# Altium PCB SmartSequins9.1.2.PcbDoc
Units mm, origin at the board's own origin, x right, y up, seen from the top; angles counter-clockwise.
Board outline 25 x 25 mm, 2 copper layers (Top Layer, Bottom Layer), stack 0.481 mm thick; 46 components, 21 nets, 103 pads, 33 vias.
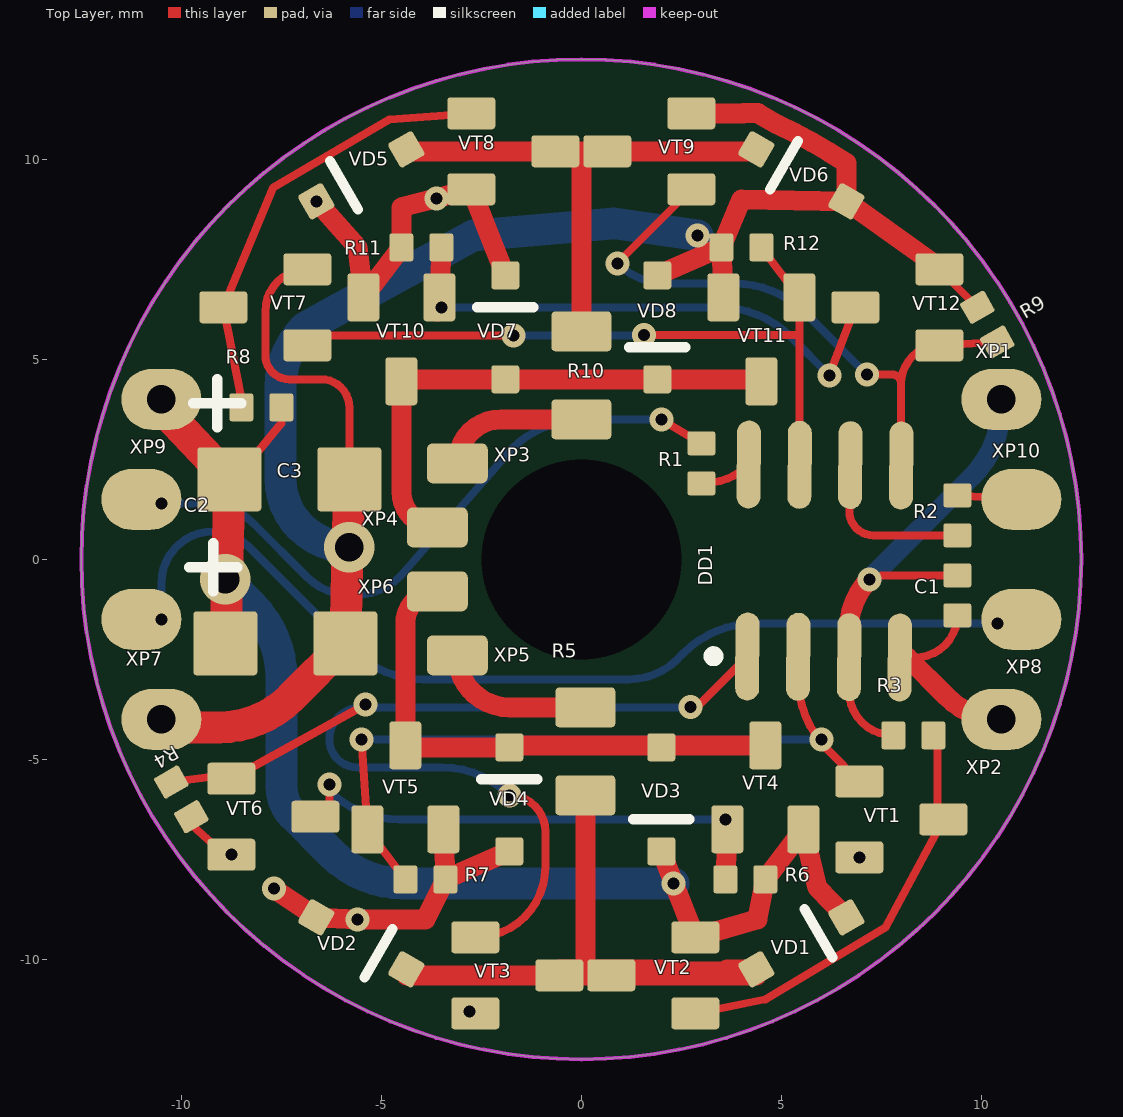
[diagram p0: Top Layer view]
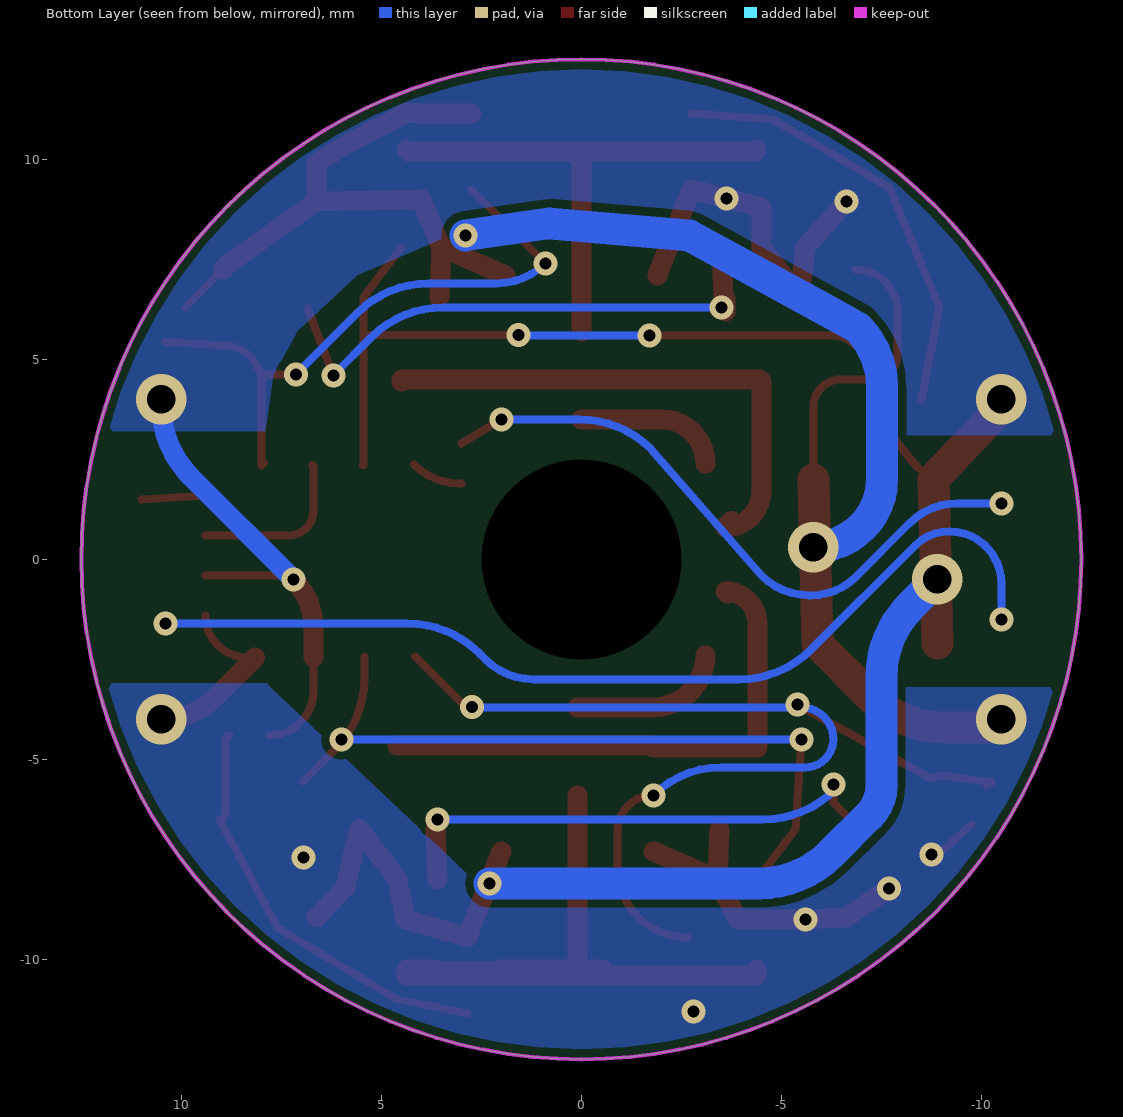
[diagram p1: Bottom Layer view, seen from below]
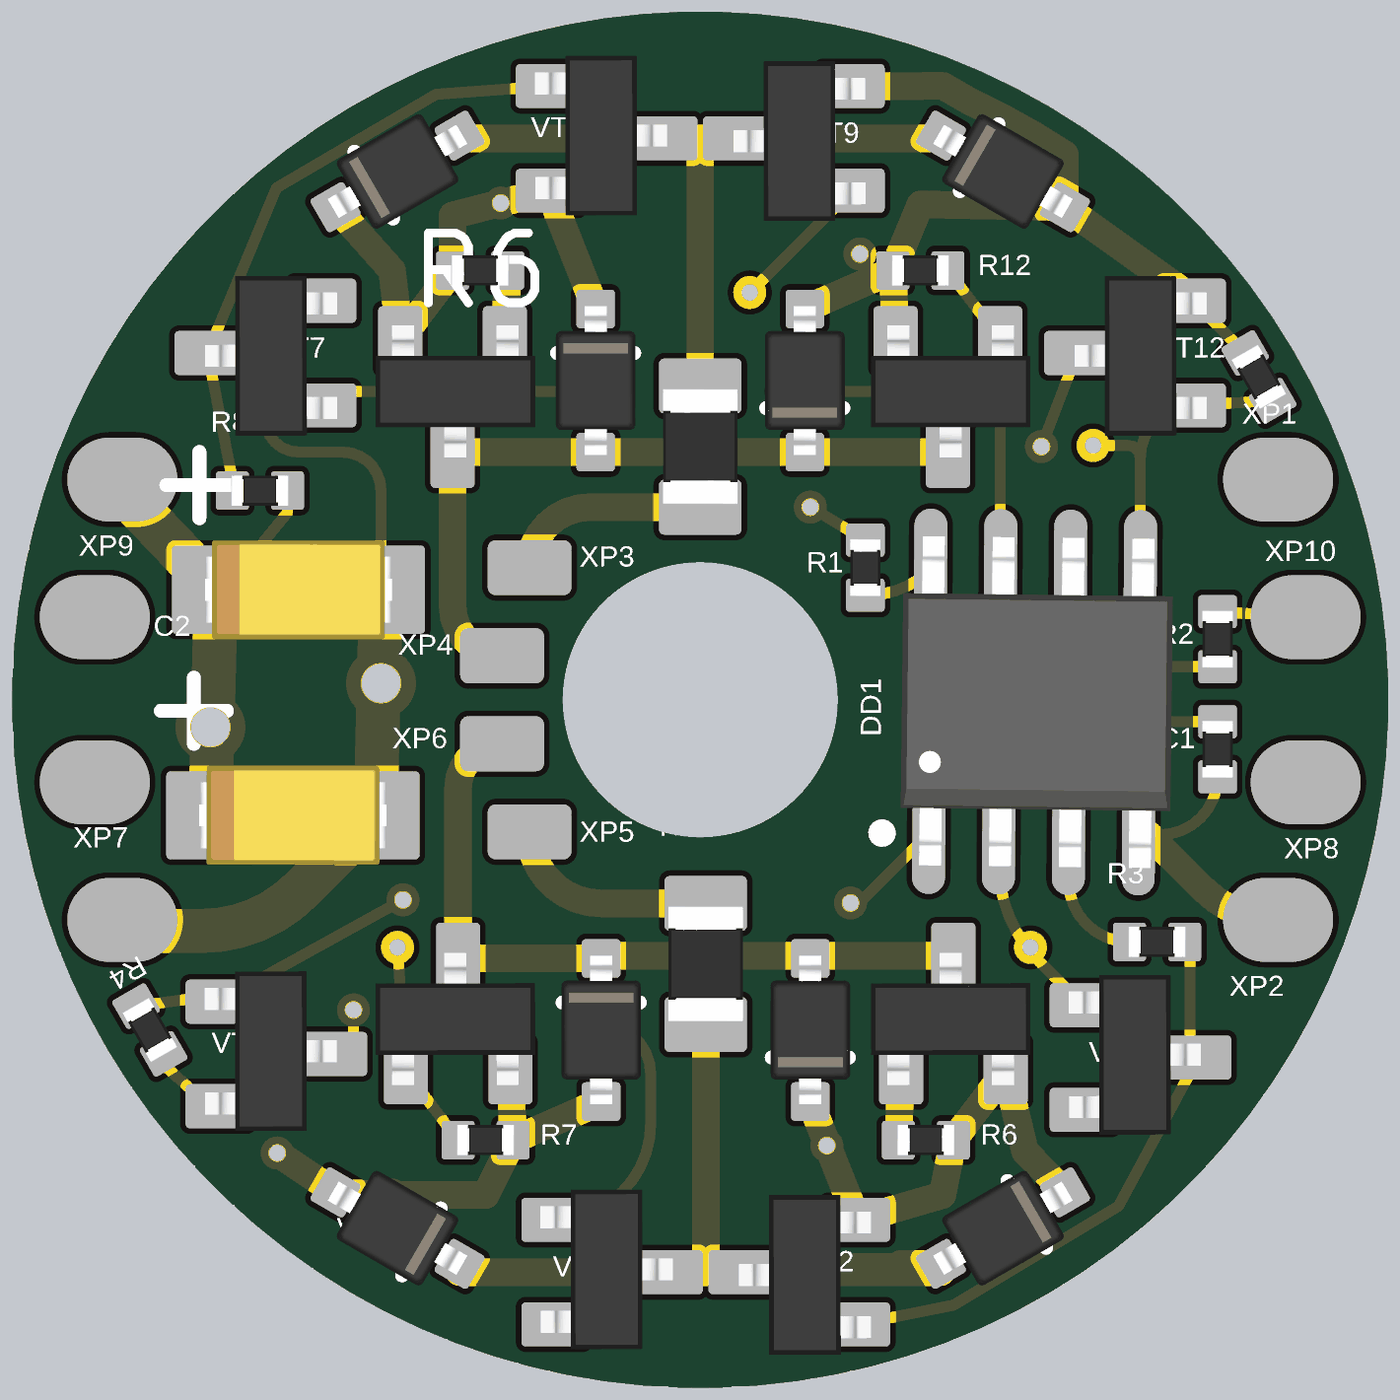
[diagram p2: 3D render of the assembled board from above, using the file's embedded part models]

## Layer stack, top to bottom
Top Solder: solder mask 0.0102, Solder Resist, Dk 3.5
Top Layer: signal copper 0.0356
Dielectric 1: dielectric 0.41, FR-4, Dk 4.8
Bottom Layer: signal copper 0.0356
Bottom Solder: solder mask 0.0102, Solder Resist, Dk 3.5

## Board outline
-12.5,0 ccw(c0,0) 0,-12.5 ccw(c0,0) 12.5,0 ccw(c0,0) 0,12.5 ccw(c0,0)

## Design rules (kind name [scope] priority, off if disabled: settings)
Clearance [All] p1: gap=0.2 ignorepadtopadclearanceinfootprint=FALSE
PolygonConnect [All] p1: thpad.connectstyle=Relief thpad.reliefconductorwidth=0.254 thpad.reliefentries=4 thpad.polygonreliefangle="90 Angle" thpad.airgapwidth=0.254 smdpad.connectstyle=Relief smdpad.reliefconductorwidth=0.254 smdpad.reliefentries=4 smdpad.polygonreliefangle="90 Angle" smdpad.airgapwidth=0.254 via.connectstyle=Direct via.reliefconductorwidth=0.254 via.reliefentries=4 via.polygonreliefangle="90 Angle" via.airgapwidth=0.254
RoutingVias [All] p1: holewidth=0.3 width=0.6 viastyle="Through Hole" minholewidth=0.3 minwidth=0.6 maxholewidth=0.3 maxwidth=0.6
SolderMaskExpansion [All] p1: expansion=0.102 istentingtop=FALSE
Width [All] p1: maxlimit=0.8 minlimit=0.2 preferedwidth=0.5
30 further rules are at their usual default settings.

## Classes and differential pairs
channel class H_bridge: U_H_bridge1 U_H_bridge2
component class U_MCU: C1 DD1 R1 R2 XP7 XP8 XP9 XP10
component class U_H_bridge2: C3 R8 R11 R12 VD5 VD6 VD7 VD8 VT7 VT8 VT9 VT10 VT11 VT12
component class U_H_bridge1: C3 R7 R8 VD1 VD2 VD3 VD4 VT1 VT2 VT3 VT4 VT5 VT6
component class SmartSequins9.1: XP1 XP2 XP3 XP4 XP5 XP6

## Components (designator, comment, footprint, x,y, rotation, side; value= is the part's Value field where it differs from the comment)
C1 "0,1uF" SMD0402(1608) 9.4,-0.9 r270 top
C2 "10uF x 10V" TANT_CAP_A(3216) -7.4,-2.1 r0 top
C3 "10uF x 10V" TANT_CAP_A(3216) -7.3,2 r0 top (schematic designator C2)
DD1 "PFC161-S08B" SOIC8 6.115,-0.042 r89.61 top
R1 "200" SMD0402(1608) 3,2.4 r90 top
R2 "200" SMD0402(1608) 9.4,1.1 r90 top
R3 "20к" SMD0402(1608) 8.3,-4.4 r0 top
R4 "20к" SMD0402(1608) -10,-6 r300 top
R5 "10" SMD0805(2012) 0.1,-4.8 r270 top
R6 "20к" SMD0402(1608) 4.1,-8 r180 top
R7 "20к" SMD0402(1608) -3.9,-8 r0 top
R8 "20к" SMD0402(1608) -8,3.8 r180 top (schematic designator R3)
R9 "20к" SMD0402(1608) 10.15,5.867 r120 top (schematic designator R4)
R10 "10" SMD0805(2012) 0,4.6 r90 top (schematic designator R5)
R11 "20к" SMD0402(1608) -4,7.8 r0 top (schematic designator R6)
R12 "20к" SMD0402(1608) 4,7.8 r180 top (schematic designator R7)
VD1 "Value" SOD323 5.5,-9.6 r30 top
VD2 "Value" SOD323 -5.5,-9.6 r330 top
VD3 "Value" SOD323 2,-6 r270 top
VD4 "Value" SOD323 -1.8,-6 r90 top
VD5 "Value" SOD323 -5.5,9.6 r210 top (schematic designator VD1)
VD6 "Value" SOD323 5.5,9.6 r150 top (schematic designator VD2)
VD7 "Value" SOD323 -1.9,5.8 r90 top (schematic designator VD3)
VD8 "Value" SOD323 1.9,5.8 r270 top (schematic designator VD4)
VT1 "IRLML0040TRPBF" SOT23-3 8,-6.5 r0 top
VT2 "IRLML2244TRPBF" SOT23-3 1.8,-10.4 r180 top
VT3 "IRLML0040TRPBF" SOT23-3 -1.6,-10.4 r0 top
VT4 "IRLML2244TRPBF" SOT23-3 4.6,-5.7 r90 top
VT5 "IRLML0040TRPBF" SOT23-3 -4.4,-5.7 r90 top
VT6 "IRLML0040TRPBF" SOT23-3 -7.701,-6.436 r0 top
VT7 "IRLML0040TRPBF" SOT23-3 -7.9,6.3 r180 top (schematic designator VT1)
VT8 "IRLML2244TRPBF" SOT23-3 -1.7,10.2 r0 top (schematic designator VT2)
VT9 "IRLML0040TRPBF" SOT23-3 1.7,10.2 r180 top (schematic designator VT3)
VT10 "IRLML2244TRPBF" SOT23-3 -4.5,5.5 r270 top (schematic designator VT4)
VT11 "IRLML0040TRPBF" SOT23-3 4.5,5.5 r270 top (schematic designator VT5)
VT12 "IRLML0040TRPBF" SOT23-3 7.9,6.3 r180 top (schematic designator VT6)
XP1 "+5V" XP_solder#1 10.7,4 r0 top
XP2 "GND" XP_solder#2 10.9,-3.4 r90 top
XP3 "A+" XP_solder#3 -3.1,2.5 r180 top
XP4 "A-" XP_solder#4 -3.6,0.8 r180 top
XP5 "B+" XP_solder#5 -3,-2.4 r180 top
XP6 "B-" XP_solder#5 -3.5,-0.8 r180 top
XP7 "OUT" XP_solder#6 -10.9,-1.6 r180 top
XP8 "IN" XP_solder#7 11.4,-1.5 r90 top
XP9 "IN" XP_solder#8 -11.4,0.3 r90 top
XP10 "OUT" XP_solder#9 11.8,1.6 r90 top

## Footprints (in the part's own frame and the unit in brackets; to place one, negate y for a bottom-side part, rotate by r counter-clockwise, add the part's x,y. Pads: shape width x height; smd on the part's side, far side on the other; paste and mask are expansions set on the pad)
SMD0402(1608) [mm] "Chip Resistor, Body 0.6x0.3mm, IPC Medium Density"
  rrect20% 0.6x0.7 smd: 1(-0.5,0) 2(0.5,0)
  body extent -0.52,-0.27 0.53,0.27, height 0.4
SMD0805(2012) [mm] "Chip Resistor, Body 0.6x0.3mm, IPC Medium Density"
  rrect20% 1x1.5 smd: 1(-1.1,0) 2(1.1,0)
  body extent -1.05,-0.68 1.05,0.67, height 0.6
SOD323 [mm] "Chip Resistor, Body 0.6x0.3mm, IPC Medium Density"
  rrect20% 0.7x0.7 smd: 1(-1.3,0) 2(1.3,0)
  silkscreen extent 0.5,-0.7 0.5,0.7, body extent -1.35,-0.72 1.35,0.73, height 1.15
SOIC8 [mm]
  oval 2.2x0.6 smd: 1(-2.4,1.945) 2(-2.4,0.675) 3(-2.4,-0.595) 4(-2.4,-1.865) 5(2.4,-1.865) 6(2.4,-0.595) 7(2.4,0.675) 8(2.4,1.945)
  silkscreen extent -2.52,2.67 -2.28,2.92, body extent -2.99,-2.45 2.99,2.45, height 1.35
SOT23-3 [mm]
  rrect20% 1.2x0.8 smd: 1(-1.05,0.95) 2(-1.05,-0.95) 3(1.05,0)
  body extent -1.3,-1.4 1.1,1.5, height 1
TANT_CAP_A(3216) [mm]
  rrect10% 1.6x1.6 smd: 1(-1.5,0) 2(1.5,0)
  silkscreen extent -2.4,1.3 -1.2,2.5, body extent -1.7,-0.9 1.7,0.9, height 1.8
XP_solder#1 [mm]
  oval 2x1.524 smd: 1(-0.2,0)
XP_solder#2 [mm]
  oval 1.524x2 smd: 1(-0.6,0.4)
XP_solder#3 [mm]
  rrect30% 1.524x1 smd: 1(0,0.1)
XP_solder#4 [mm]
  rrect30% 1.524x1 smd: 1(0,0)
XP_solder#5 [mm]
  rrect30% 1.524x1 smd: 1(0.1,0)
XP_solder#6 [mm]
  oval 2x1.524 smd: 1(0.1,-0.1)
XP_solder#7 [mm]
  oval 1.524x2 smd: 1(0,0.4)
XP_solder#8 [mm]
  oval 1.524x2 smd: 1(1.2,-0.4)
XP_solder#9 [mm]
  oval 1.524x2 smd: 1(-0.1,0.8)

## Part data
C1: Package=SMD0402, ValueBOM="Конденсатор керамический 0,1мкФ х 50В SMD 0402 1%", Type=C
C2 C3: Package="SMD A", ValueBOM="Конденсатор танталовый 10мкФ х 10В SMD A", Type=C
DD1: Package=SOIC-8, ValueBOM="Микроконтроллер PFC161-S08B, SOIC-8", Type=DD
R1 R2: Package=SMD0402, ValueBOM="Резистор 200Ом SMD 0402 1%", Type=R
R3 R4 R6 R7 R8 R9 R11 R12: Package=SMD0402, ValueBOM="Резистор 20кОм SMD 0402 1%", Type=R
R5 R10: Package=SMD0805, ValueBOM="Резистор 10 Ом SMD 0805 1%", Type=R
VD1 VD2 VD3 VD4 VD5 VD6 VD7 VD8: Package=SOD323, ValueBOM="Диод Шоттки SOD323", Type=VD
VT1 VT3 VT5 VT6 VT7 VT9 VT11 VT12: library part VT_N_MOSFET_SOT23_3, Package=SOT-23, ValueBOM="Транзистор n-МОП IRLML0040TRPBF SOT23", Type=VT
VT2 VT4 VT8 VT10: library part VT_P_MOSFET_SOT23_3, Package=SOT-23, ValueBOM="Транзистор p-МОП IRLML2244TRPBF SOT23", Type=VT
XP1 XP2 XP3 XP4 XP5 XP6 XP7 XP8 XP9 XP10: library part XP_solder

## Free pads (board coordinates)
  round 1.524 hole 5 unplated: 18(0,0)
  oval 2x1.524 smd: 19(-10.5,-4) 19(-10.5,4)

## Via types
v1: diameter 0.6, hole 0.3, Top Layer to Bottom Layer, tented both sides, 21 vias
v2: diameter 0.6, hole 0.3, Top Layer to Bottom Layer, 6 vias
v3: diameter 1.27, hole 0.711, Top Layer to Bottom Layer, tented both sides, 6 vias

## Nets (pads, with @x,y where several pads share a name; then routed paths per layer and width w, separated by ;. In a path a pad name is that pad's centre, name@x,y a point inside that pad or via, vN(x,y) a via of type N, cw(c..) or ccw(c..) an arc to the next point about the centre after c; other vN are vias at no path point)
GND_B_U_H_bridge1: C1.2 C2.2 C3.2 DD1.4 pad.19@-10.5,-4 R4.2 R7.2 R9.2 R12.2 VD2.1 VD4.1 VD6.1 VD8.1 VT1.2 VT3.2 VT5.2 VT6.2 VT7.2 VT9.2 VT11.2 VT12.2 XP2.1 | length 64.7
  Top Layer w0.2: R4.2@-9.75,-6.633 VT6.2@-8.9,-7.4 ; VT7.2 ccw(c-6.85,6.2) -7.9,6.2 -7.9,5.1 ccw(c-7.3,5.1) -7.3,4.5 -6.5,4.5 cw(c-6.5,3.8) -5.8,3.8 C3.2 ; DD1.4@8.154,-2.455 8.345,-2.455 ccw(c8.345,-1.4) C1.2 ; VT12.2 R9.2 ; XP2.1@10.3,-4.2 v3(10.5,-4)
  Top Layer w0.5: v1(-7.686,-8.235) VD2.1 v1(-5.6,-9) -3.9,-9 R7.2 ; VT5.2 R7.2 ; VD4.1 R7.2 ; VD8.1 3.107,7.628 R12.2 ; VT9.2 4.054,11.15 4.056,11.152 4.411,11.152 4.903,10.869 cw(c-0.568,-0.956) 6.626,9.907 VD6.1 ; VT11.2 R12.2 ; DD1.4@8.154,-2.455 9.133,-3.434 ccw(c10.5,-2.067) v3(10.5,-4) ; VT12.2 8.8,7.4 VD6.1 ; R12.2 4,9 VD6.1
  Top Layer w0.8: v3(-10.5,-4) -10.5,-4.2 -9.052,-4.2 ccw(c-9.052,-1.66) -7.256,-3.456 C2.2 -5.841,0.301 C3.2
  Bottom Layer w0.8: v3(-5.8,0.3) cw(c-5.8,2.022) -7.522,2.022 -7.522,4.299 cw(c-5.399,4.299) -6.9,5.8 -6.305,6.126 -2.7,8.1 0.8,8.4 v1(2.9,8.1)
  other v1: -2.8,-11.3 6.95,-7.45 -8.751,-7.386
MCU_VCC: C1.1 C2.1 C3.1 DD1.3 pad.19@-10.5,4 R3.1 R6.1 R8.1 R11.1 VD1.2 VD3.2 VD5.2 VD7.2 VT2.2 VT4.2 VT8.2 VT10.2 XP1.1 | length 57
  Top Layer w0.2: pad.19@-10.7,4 v3(-10.5,4) ; C3.1 -8.4,2.3 -7.5,3.4 R8.1@-7.5,4 ; DD1.3 6.693,-3.293 ccw(c7.8,-3.293) R3.1 ; 7.5,-0.4 C1.1
  Top Layer w0.5: v1(-6.626,8.95) -5.6,7.8 VT10.2 R11.1 -4.5,8.8 VT8.2 VD7.2 ; VD3.2 2.314,-8.094 VT2.2 4.4,-9 R6.1 VT4.2 5.9,-8.2 VD1.2 ; DD1.3 6.693,-1.724 cw(c8.424,-1.724) v1(7.2,-0.5)
  Top Layer w0.8: pad.19@-10.7,4 -10.605,3.9 C3.1 -8.861,-0.501 C2.1
  Bottom Layer w0.5: v1(7.2,-0.5) 9.756,2.056 ccw(c7.96,3.852) 10.5,3.852 v3(10.5,4)
  Bottom Layer w0.8: v3(-8.9,-0.5) -8.244,-1.156 cw(c-10.04,-2.952) -7.5,-2.952 -7.5,-5.676 ccw(c-6.476,-5.676) -7.2,-6.4 -6.244,-7.356 ccw(c-4.448,-5.56) -4.448,-8.1 v1(2.3,-8.1)
  other v1: -3.625,9.025
NetDD1_1: DD1.1 R4.1 VT3.1 VT6.1 | length 27.2
  Top Layer w0.2: R4.1@-10.137,-5.65 R4.1 -9,-5.4 VT6.1 v1(-5.401,-3.636) ; VT3.1 ccw(c-2.65,-7.7) -0.9,-7.7 -0.9,-6.8 ccw(c-1.8,-6.8) v1(-1.8,-5.9) ; v1(2.73,-3.692) 2.889,-3.692 DD1.1
  Bottom Layer w0.2: v1(-1.8,-5.9) ccw(c-3.49,-7.59) -3.49,-5.2 -5.6,-5.2 cw(c-5.6,-4.5) -6.3,-4.5 cw(c-5.5,-4.5) -5.5,-3.7 v1@2.766,-3.7 ; v1(2.73,-3.692) v1@2.766,-3.656
NetDD1_2: DD1.2 R7.1 VT1.1 VT5.1 | length 19
  Top Layer w0.2: v2(-5.5,-4.5) VT5.1 R7.1 ; DD1.2 5.423,-2.971 ccw(c7.963,-2.971) 6.167,-4.767 VT1.1
  Bottom Layer w0.2: v2(-5.5,-4.5) v2(6,-4.5)
NetDD1_5: DD1.5 R9.1 VT9.1 VT12.1 | length 15.9
  Top Layer w0.2: v2(0.9,7.4) VT9.1 ; v2(7.137,4.621) 7.771,4.621 cw(c7.771,4.396) 7.996,4.396 ; DD1.5@7.939,2.402 DD1.5 7.996,4.396 ; R9.1 VT12.1 ccw(c8.95,4.396) 7.996,4.396
  Bottom Layer w0.2: v2(0.9,7.4) ccw(c2.107,8.607) 2.107,6.9 3.806,6.9 cw(c3.806,4.36) 5.602,6.156 v2(7.137,4.621)
NetDD1_6: DD1.6 R2.1 | length 4.2
  Top Layer w0.2: DD1.6 ccw(c6.726,2.328) 6.7,2.328 6.7,1.2 ccw(c7.3,1.2) 7.3,0.6 R2.1
NetDD1_7: DD1.7 R12.1 VT7.1 VT11.1 | length 18.2
  Top Layer w0.2: VT7.1@-6.8,5.4 VT7.1 cw(c-6.246,4.746) -6.246,5.6 v2(-1.7,5.6) ; v2(1.57,5.605) 5.445,5.605 5.446,5.604 5.45,5.6 ; R12.1 VT11.1 5.45,5.6 ; DD1.7 5.45,2.363 5.45,5.6
  Bottom Layer w0.2: v2(-1.7,5.6) 1.57,5.6 1.575,5.6 v2(1.57,5.605)
NetDD1_8: DD1.8 R1.1 | length 1.3
  Top Layer w0.2: R1.1 3.048,1.9 ccw(c3.048,3.509) DD1.8
NetR1_2: R1.2 XP9.1 | length 16.2
  Top Layer w0.2: v1(2,3.5) R1.2
  Bottom Layer w0.2: v1(-10.5,1.4) -9.407,1.4 cw(c-9.407,-0.307) -8.2,0.9 -6.861,-0.439 ccw(c-5.748,0.674) -5.748,-0.9 -5.7,-0.9 ccw(c-5.7,0.79) -4.505,-0.405 -1.744,2.756 cw(c0.052,0.96) 0.052,3.5 v1(2,3.5)
NetR2_2: R2.2 XP10.1 | length 1.6
  Top Layer w0.2: R2.2 XP10.1
NetR3_2: R3.2 VT1.3 VT2.1 | length 10.6
  Top Layer w0.2: VT2.1 4.6,-11 7.6,-9.2 VT1.3 cw(c9.05,-6.35) 8.9,-6.35 8.9,-4.5 ccw(c8.8,-4.5) R3.2
NetR5_1: R5.1 XP5.1 | length 3.9
  Top Layer w0.5: XP5.1 ccw(c-1.8,-2.4) -1.8,-3.7 R5.1
NetR5_2: R5.2 VD1.1 VD2.2 VT2.3 VT3.3 | length 18.5
  Top Layer w0.5: VD2.2 -4.374,-10.4 VT3.3 ; R5.2 0.1,-10.25 ; VT3.3 -0.55,-10.25 0.1,-10.25 ; VT3.3 VT2.3 4.374,-10.4 VD1.1 3.64,-10.25 3.59,-10.3 2.11,-10.3 2.06,-10.25 0.1,-10.25
NetR6_2: R6.2 VT4.1 VT6.3 | length 12.4
  Top Layer w0.2: VT6.3 -6.301,-6.086 v1(-6.301,-5.636)
  Top Layer w0.5: R6.2 VT4.1
  Bottom Layer w0.2: v1@-6.4,-5.7 -6.344,-5.756 ccw(c-4.548,-3.96) -4.548,-6.5 v1(3.6,-6.5)
NetR8_2: R8.2 VT7.3 VT8.1 | length 11
  Top Layer w0.2: R8.2@-8.5,4 VT7.3 -7.7,9.3 -4.8,11 VT8.1
NetR10_1: R10.1 XP3.1 | length 3.7
  Top Layer w0.5: XP3.1 cw(c-2,2.4) -2,3.5 R10.1
NetR10_2: R10.2 VD5.1 VD6.2 VT8.3 VT9.3 | length 13.3
  Top Layer w0.5: VD5.1 -4.324,10.2 VT8.3 0,10.2 ; R10.2 0,10.2 ; VD6.2 4.324,10.2 VT9.3 0,10.2
NetR11_2: R11.2 VT10.1 VT12.3 | length 13.9
  Top Layer w0.2: v1(6.2,4.6) VT12.3
  Top Layer w0.5: v1(-3.5,6.3) ccw(c-3.5,6.2) -3.6,6.2 -3.6,6.5 cw(c-3.55,6.5) VT10.1 R11.2
  Bottom Layer w0.2: v1(-3.5,6.3) 3.448,6.3 cw(c3.448,3.76) 5.244,5.556 v1(6.2,4.6)
NetVD3_1: VD3.1 VD4.2 VT4.3 VT5.3 XP6.1 | length 13.5
  Top Layer w0.5: XP6.1@-3.656,-0.856 XP6.1 ccw(c-3.6,-1.6) -4.4,-1.6 VT5.3 -4.4,-4.7 VD4.2 -1.8,-4.65 VT4.3
NetVD7_1: VD7.1 VD8.2 VT10.3 VT11.3 XP4.1 | length 13.4
  Top Layer w0.5: XP4.1@-3.756,0.956 XP4.1 cw(c-3.6,1.7) -4.5,1.7 VT10.3 -4.45,4.5 VD7.1 VD8.2 4.45,4.5 cw(c4.45,4.45) VT11.3
NetXP7_1: XP7.1 XP8.1 | length 24.3
  Bottom Layer w0.2: v1(-10.5,-1.5) -10.5,-0.6 cw(c-9.2,-0.6) -9.2,0.7 cw(c-9.2,-0.507) -8.346,0.346 -5.744,-2.256 ccw(c-3.948,-0.46) -3.948,-3 1.193,-3 ccw(c1.193,-1.293) 2.4,-2.5 2.556,-2.344 cw(c4.352,-4.14) 4.352,-1.6 v1(10.4,-1.6)

## Polygon pours and split planes (outlines as drawn)
MCU_VCC on Bottom Layer "NONET_L-01_P-001" (solid, remove dead copper, pour order 0): -12.6,3.1 -8.1,3.1 ccw(c-8.1,3.8) -7.4,3.8 -7.1,5.7 -2.7,8.1 3.5,8 5.6,7.1 7.1,5.7 7.7,4.6 7.9,3.2 12.9,3.2 12.9,14.1 -12.6,14
GND_B_U_H_bridge1 on Bottom Layer "NONET_L-01_P-001" (solid, remove dead copper, pour order 1): 12.6,-3.1 7.914,-3.1 ccw(c7.893,-3.219) 7.774,-3.198 2.6,-8.1 -0.7,-8.1 -4.8,-8.1 -6.822,-6.978 -7.7,-5.7 -7.4,-4.5 -7.4,-3.2 -12.9,-3.2 -12.9,-14.1 12.6,-14

## Keep-outs
Keep-Out Layer:
  circle w0.1: c0,0 r12.5